# Altium PCB PCB.PcbDoc (part 2 of 2)
Units mm, origin at the board's own origin, x right, y up, seen from the top; angles counter-clockwise.
Board outline 25 x 40 mm, 4 copper layers (L1-Sig, L2-Gnd, L3-Gnd, L4-Sig), stack 1.591 mm thick; 54 components, 44 nets, 207 pads, 194 vias.
Unrouted connection lines stored in the file: 1.
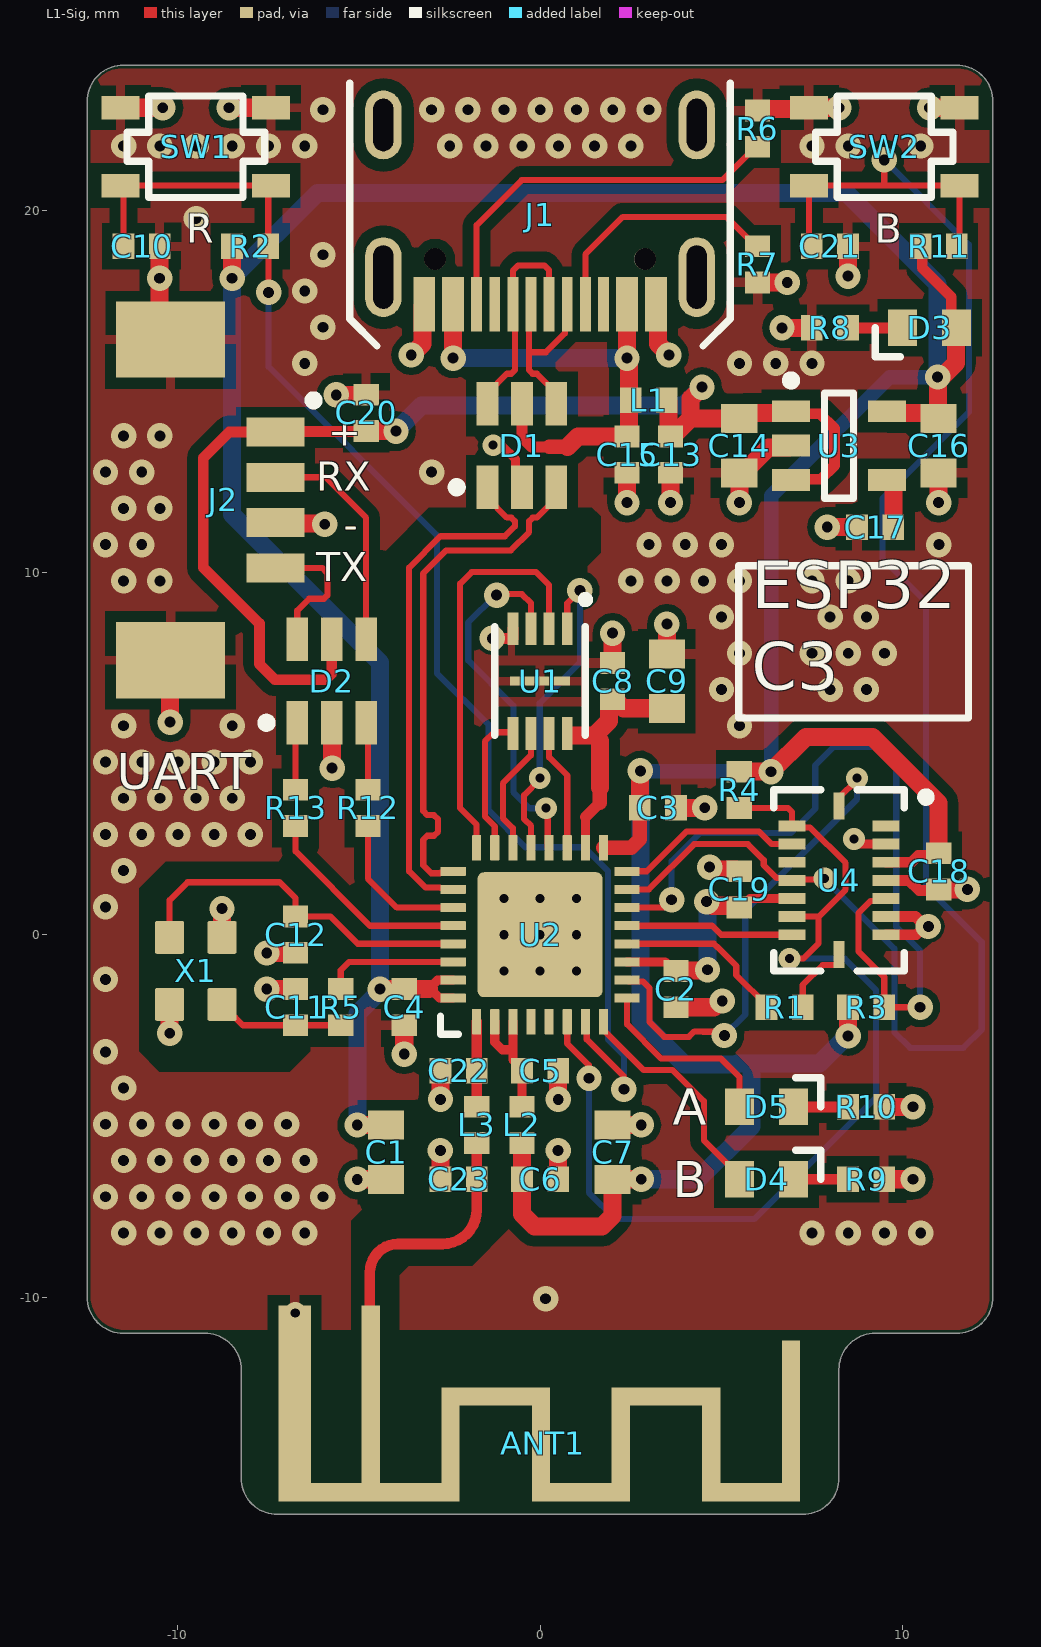
[diagram p0: L1-Sig view]

## Via types
v1: diameter 0.7, hole 0.3, L1-Sig to L4-Sig, tented both sides, 177 vias
v2: diameter 0.6, hole 0.25, L1-Sig to L4-Sig, tented both sides, 16 vias
v3: diameter 0.6/0.6/0.6/0.6 (per signal layer), hole 0.25, L1-Sig to L4-Sig, tented both sides, 1 vias

## Nets (pads, with @x,y where several pads share a name; then routed paths per layer and width w, separated by ;. In a path a pad name is that pad's centre, name@x,y a point inside that pad or via, vN(x,y) a via of type N, cw(c..) or ccw(c..) an arc to the next point about the centre after c; other vN are vias at no path point) (continued)
NetD2_6: (continued)
  L1-Sig w0.17: J2.4 -6.01,10.125 -5.867,9.982 -5.867,9.371 -5.967,9.271 -6.375,9.271 -6.7,8.946 D2.6
NetD4_K: D4.K R9.2 | length 1.5
  L1-Sig w0.3: D4.K R9.2
NetD5_K: D5.K R10.2 | length 1.5
  L1-Sig w0.3: D5.K R10.2
NetJ1_A5: J1.A5 R7.2 | length 6.9
  L1-Sig w0.17: J1.A5 1.25,18.776 2.286,19.812 5.138,19.812 5.95,19 R7.2
NetJ1_B5: J1.B5 R6.2 | length 10.8
  L1-Sig w0.17: J1.B5 -1.75,19.586 -0.508,20.828 5.028,20.828 5.95,21.75 R6.2
NetR1_2: R1.2 U2.12 | length 4.8
  L1-Sig w0.17: U2.12 4.796,-0.25 4.877,-0.331 4.886,-0.331 5.416,-0.86 5.416,-1.116 6.25,-1.95 R1.2
NetR12_2: R12.2 U2.27 | length 4.1
  L1-Sig w0.17: R12.2 -4.75,1.55 -3.95,0.75 U2.27
NetR13_2: R13.2 U2.28 | length 5.9
  L1-Sig w0.17: R13.2 -6.75,2.305 -4.695,0.25 U2.28
SPI_CLK: U1.6 U2.22 | length 3.6
  L1-Sig w0.17: U2.22 -0.75,2.942 -1.024,3.216 -1.024,4.176 -0.25,4.95 U1.6@-0.25,5.555
SPI_DI: U1.5 U2.23 | length 3.9
  L1-Sig w0.17: U2.23 -1.25,2.99 -1.524,3.264 -1.524,5.334 -1.27,5.588 -0.783,5.588 U1.5
SPI_DO: U1.2 U2.24 | length 11.4
  L1-Sig w0.17: U2.24 -1.75,3.037 -2.209,3.496 -2.209,9.691 -1.892,10.008 -0.108,10.008 0.25,9.65 U1.2
SPI_NCS: U1.1 U2.21 | length 9
  L1-Sig w0.17: U2.21 -0.25,3.005 -0.439,3.194 -0.439,3.855 -0.007,4.287 v2(-0.007,4.329) ; U1.1 0.75,9.15 v1(1.1,9.5)
  L4-Sig w0.17: v2(-0.007,4.329) -0.007,6.393 1.1,7.5 v1(1.1,9.5)
SPI_NHLD: U1.7 U2.19 | length 3.4
  L1-Sig w0.17: U1.7 0.25,4.899 0.75,4.399 U2.19
SPI_NWP: U1.3 U2.20 | length 10.3
  L1-Sig w0.17: v1(-1.2,9.373) -1.173,9.4 -0.5,9.4 -0.25,9.15 U1.3 ; v2(0.165,3.492) 0.21,3.447 0.21,2.44 U2.20
  L4-Sig w0.17: v1(-1.2,9.373) -1.227,9.373 -1.981,8.619 -1.981,7.569 -0.737,6.325 -0.737,3.937 -0.292,3.492 v2(0.165,3.492)
UART0_RX: D2.3 R12.1 | length 1.9
  L1-Sig w0.17: D2.3 -4.75,5.8 R12.1
UART0_TX: D2.1 R13.1 | length 1.9
  L1-Sig w0.17: R13.1 -6.75,5.8 D2.1
USB_D_N: D1.4 J1.A7 J1.B7 | length 5.2
  L1-Sig w0.17: J1.A7 -0.305,17.345 -0.305,16.078 ; D1.4 0.45,14.95 -0.085,15.485 -0.205,15.485 -0.305,15.585 -0.305,16.078 ; J1.B7 0.685,17.335 0.685,16.603 0.161,16.078 -0.305,16.078
USB_D_P: D1.6 J1.A6 J1.B6 | length 6.1
  L1-Sig w0.17: D1.6 -1.45,14.95 -0.915,15.485 -0.795,15.485 -0.695,15.585 -0.695,17.345 J1.B6 -0.75,18.325 -0.604,18.472 0.121,18.472 0.25,18.343 J1.A6
VCC_SPI: C8.2 C9.2 U1.8 U2.18 | length 6.8
  L1-Sig w0.25: U2.18 1.25,3.248
  L1-Sig w0.3: 1.25,3.248 1.651,3.649
  L1-Sig w0.4: 1.651,3.649 1.651,4.064
  L1-Sig w0.5: U1.8@0.85,5.5 1.5,5.5 ; 1.651,4.064 1.651,5.349 1.5,5.5 ; C8.2 1.95,6.5 1.9,6.45 1.9,5.9 1.5,5.5 ; C8.2@2.05,6.5 2.3,6.25 C9.2
XTAL_IN: C11.2 R5.2 X1.1 | length 3.5
  L1-Sig w0.17: X1.1 -8.775,-1.975 -8.46,-2.29 -8.41,-2.29 -8.2,-2.5 C11.2 R5.2
XTAL_N: C12.2 U2.29 X1.3 | length 10.1
  L1-Sig w0.17: X1.3 -10.225,0.951 -9.728,1.448 -7.188,1.448 -6.75,1.01 C12.2 -5.783,0.5 -5.033,-0.25 U2.29
XTAL_P: R5.1 U2.30 | length 3.7
  L1-Sig w0.17: R5.1 -5.5,-0.979 -5.271,-0.75 U2.30
pads on no net: J1.A8 J1.B8 J1.MH J1.SH U2.4 U2.5 U4.1 U4.13

## Polygon pours and split planes (outlines as drawn)
GND on L4-Sig "GND_L04_P001" (solid, pour order 1): -12.395,23.063 cw(c-11.557,23.063) -11.557,23.901 11.532,23.901 cw(c11.532,23.038) 12.395,23.038 12.395,-10.008 cw(c11.506,-10.008) 11.506,-10.897 -11.481,-10.897 cw(c-11.481,-9.982) -12.395,-9.982
GND on L1-Sig "GND_L01_P002" (solid, pour order 2): -12.395,23.063 cw(c-11.557,23.063) -11.557,23.901 11.532,23.901 cw(c11.532,23.038) 12.395,23.038 12.395,-10.008 cw(c11.506,-10.008) 11.506,-10.897 -11.481,-10.897 cw(c-11.481,-9.982) -12.395,-9.982
GND on L2-Gnd "GND_L02_P000" (solid, pour order 0): -12.395,23.063 cw(c-11.557,23.063) -11.557,23.901 11.532,23.901 cw(c11.532,23.038) 12.395,23.038 12.395,-10.008 cw(c11.506,-10.008) 11.506,-10.897 -11.481,-10.897 cw(c-11.481,-9.982) -12.395,-9.982
GND on L3-Gnd "GND_L03_P003" (solid, pour order 3): -12.395,23.063 cw(c-11.557,23.063) -11.557,23.901 11.532,23.901 cw(c11.532,23.038) 12.395,23.038 12.395,-10.008 cw(c11.506,-10.008) 11.506,-10.897 -11.481,-10.897 cw(c-11.481,-9.982) -12.395,-9.982

## Other copper
L1-Sig:
  pour cut-out: -4.27,10.592 -3.068,11.794 1.432,11.794 1.682,11.544 1.682,10.544 1.273,10.135 -2.086,10.135 -2.568,9.652 -2.568,1.524 -2.994,1.099 -3.623,1.099 -4.27,1.745
  pour cut-out: -5.225,-10.897 -3.877,-10.897 -3.877,-9.397 -3.627,-9.147 -1.877,-9.147 -0.802,-8.071 -0.802,-7.397 -4.727,-7.397 -5.225,-7.894
  pour cut-out: -11.082,1.281 -10.332,2.031 -7.082,2.031 -6.332,1.281 -6.332,-3.219 -6.905,-3.792 -10.508,-3.792 -11.082,-3.219

## Silkscreen, mask and mechanical layers (free items; w line width, h text height)
Top Overlay:
  lines w0.2: 5.486,5.984 5.486,10.185 11.822,10.185 11.822,5.984 5.486,5.984
  text "R" at -9.766,19.1 h0.8
  text "B" at 9.233,19.1 h0.8
  text "+" at -5.844,13.494 h0.8
  text "RX" at -6.177,12.251 h0.8
  text "-" at -5.413,10.929 h0.8
  text "TX" at -6.177,9.751 h0.8
  text "ESP32 / C3" at 5.836,6.336 h2.25
  text "UART" at -11.687,4.021 h1
  text "A" at 3.667,-5.25 h1
  text "B" at 3.667,-7.25 h1
Bottom Overlay:
  text "Khaqan Umar" at 6.833,-14.707 h2.25
Board Shape:
  lines w0.2: 11.5,-11 ccw(c11.5,-10) 12.5,-10 12.5,23 ccw(c11.5,23) 11.5,24 -11.5,24 ccw(c-11.5,23) -12.5,23 -12.5,-10 ccw(c-11.5,-10) -11.5,-11 -9.25,-11 cw(c-9.25,-12) -8.25,-12 -8.25,-15 ccw(c-7.25,-15) -7.25,-16 7.25,-16 ccw(c7.25,-15) 8.25,-15 8.25,-12 cw(c9.25,-12) 9.25,-11 11.5,-11 ; 11.5,-11 ccw(c11.5,-11) 11.5,-11 ; 11.5,-11 11.5,-11

## Text inside footprints (layer, text, board x,y; h text height)
D3: Mechanical 13 "+" at 12.067,17.358 h0.5
D4: Mechanical 13 "+" at 4.933,-7.358 h0.5 r180
D5: Mechanical 13 "+" at 4.933,-5.358 h0.5 r180